# Altium PCB AIRZAI_LID_BD_REVA.PcbDoc (part 2 of 2)
Units mil, origin at the board's own origin, x right, y up, seen from the top; angles counter-clockwise.
Board outline 3392.82 x 2969.83 mil, 4 copper layers (Top, GND, PWR, Bottom), stack 30.709 mil thick; 77 components, 60 nets, 278 pads, 262 vias.
Unrouted connection lines stored in the file: 140.
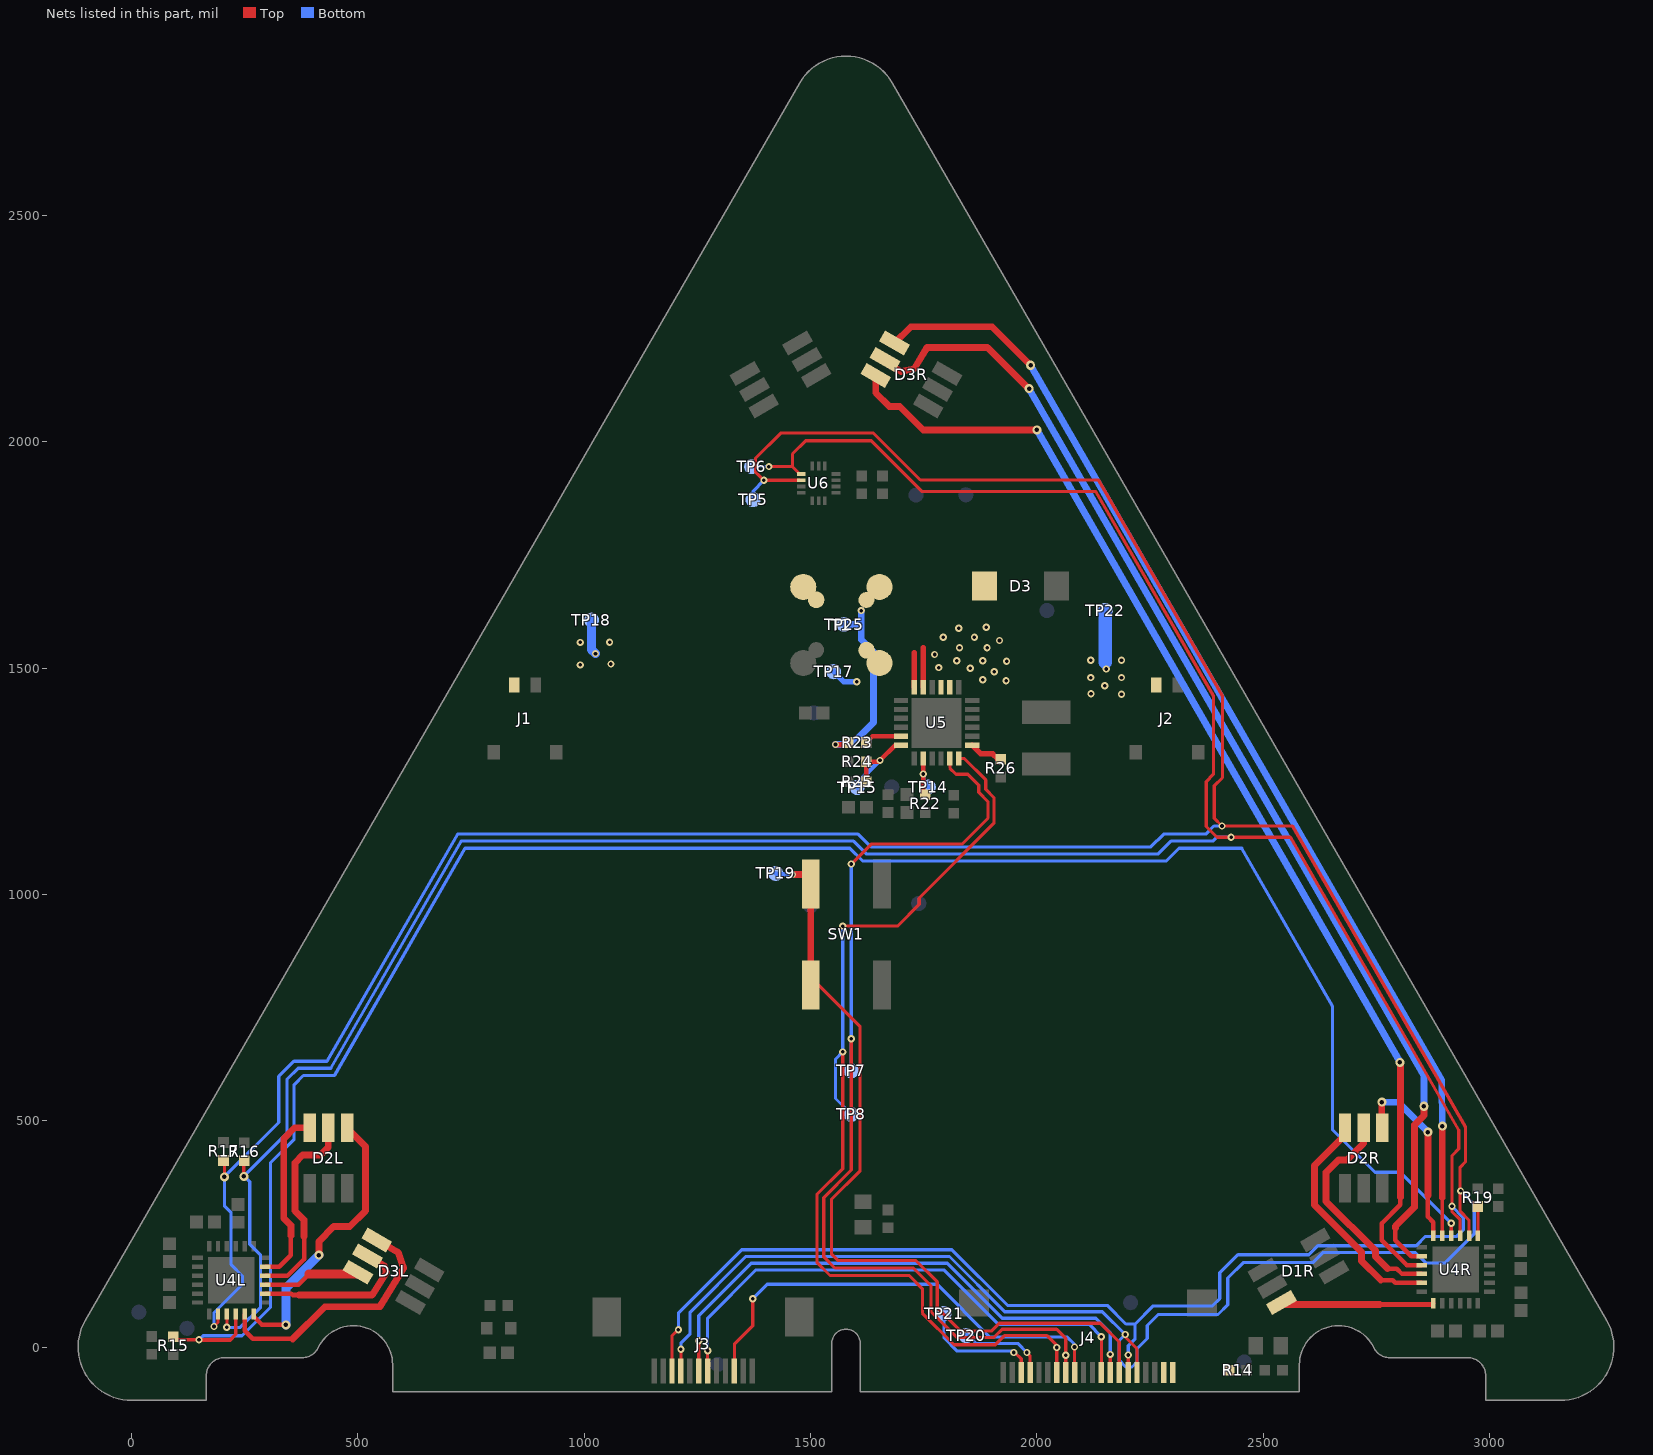
[diagram p4: the nets of this part, all layers, seen from the top]

## Via types
v1: diameter 16, hole 8, Top to Bottom, tented both sides, 175 vias
v2: diameter 20, hole 10, Top to Bottom, tented both sides, 71 vias
v3: diameter 20, hole 8, Top to Bottom, 10 vias
v4: diameter 20, hole 10, Top to Bottom, 5 vias
v5: diameter 23.62, hole 11.81, Top to Bottom, tented both sides, 1 vias

## Nets (pads, with @x,y where several pads share a name; then routed paths per layer and width w, separated by ;. In a path a pad name is that pad's centre, name@x,y a point inside that pad or via, vN(x,y) a via of type N, cw(c..) or ccw(c..) an arc to the next point about the centre after c; other vN are vias at no path point) (continued)
NetD1R_6: D1R.6 U4R.19 | length 338.4
  Top w10: 2757.54,94 2873.53,94 U4R.19@2875.98,96.46
  Top w15: D1R.6@2540.38,98.29 2544.68,94 2757.54,94
NetD2L_4: D2L.4 U4L.12 | length 630.5
  Top w10: U4L.12@269.68,72.83 269.68,67.32 288,49 v2(341,49)
  Top w15: v2(414,203) 414,233.43 446.57,266 482,266 517,301 517,443.35 D2L.4@475.94,484.41
  Bottom w20: v2(341,49) 341,130 v2(414,203)
NetD2L_5: D2L.5 U4L.16 | length 452.8
  Top w10: U4L.16@295.28,157.48 344.42,157.48 381,194.06 381,244
  Top w15: 381,244 381,281 361,301 361,407 378,424 417,424 434.61,441.61 D2L.5@434.61,484.41
NetD2L_6: D2L.6 U4L.17 | length 398.4
  Top w10: U4L.17@295.28,177.17 326.17,177.17 352,203 352,246
  Top w15: 352,246 352,269 336,285 336,460 360.41,484.41 D2L.6@393.27,484.41
NetD2R_4: D2R.4 U4R.12 | length 421.4
  Top w10: 2864,335 2864,288 2875.98,276.02 U4R.12@2875.98,246.06
  Top w15: v2(2762,541) 2762,485.76 D2R.4@2763.35,484.41 ; 2864,335 v2(2864,475) v2@2864,476
  Bottom w15: v2(2762,541) 2798,541 v2(2864,475)
NetD2R_5: D2R.5 U4R.16 | length 493.4
  Top w10: 2774.69,173.31 2794.69,173.31 2806.58,161.42 U4R.16@2850.39,161.42
  Top w15: D2R.5@2722.01,484.41 2722.01,450.01 2685,413 2666,413 2639,386 2639,322 2748,213 2748,200 2774.69,173.31
NetD2R_6: D2R.6 U4R.17 | length 518.7
  Top w10: 2759.68,147.67 2785.87,147.67 2791.81,141.73 U4R.17@2850.39,141.73
  Top w15: D2R.6@2680.67,484.41 2680.67,468.67 2613,401 2613,314 2717,210 2717,190.36 2759.68,147.67
NetD3_1: D3.1 R23.2 T1.3 TP25.1 | length 458.4
  Top w12: v1(1555,1331) 1578.95,1331 R23.2@1583.42,1335.46
  Bottom w15: v1(1555,1331) 1590.54,1331 1639,1379.46 1639,1536 1612,1563 v1(1612,1627) 1612,1602.24 1605.76,1596 TP25.1@1574,1596
NetD3L_4: D3L.4 U4L.11 | length 564
  Top w10: U4L.11@250,72.83 250,36 268,18 356,18
  Top w15: 356,18 427,89 549,89 ; D3L.4@541.6,236.82 589,209 598,182.62 600,177 601,174 549,89.38
NetD3L_5: D3L.5 U4L.14 | length 354
  Top w10: U4L.14@295.28,118.11 353,118.11 356.11,115 370.11,115
  Top w15: 370.11,115 531,115 ; D3L.5@520.94,201.02 559,179 563,165.35 531.91,115.43
NetD3L_6: D3L.6 U4L.15 | length 216.4
  Top w10: U4L.15@295.28,137.8 368.8,137.8 392.42,161.42
  Top w20: 392.42,161.42 496.46,161.42 D3L.6@500.27,165.22
NetD3R_4: D3R.4 U4R.11 | length 2516.4
  Top w8: U4R.11@2895.67,246.06 2895.67,330
  Top w15: D3R.4@1685.31,2217.77 1721.54,2254 1901,2254 v2(1986,2169) ; 2895.67,330 v2(2895.67,488)
  Bottom w15: v2(1986,2169) 2894.63,588.4 v2(2895.67,488)
NetD3R_5: D3R.5 U4R.14 | length 2611.9
  Top w10: 2792,263 2792,236 2827.21,200.79 U4R.14@2850.39,200.79
  Top w15: D3R.5@1664.64,2181.97 1673.45,2181.97 1673.45,2170 1700,2155 1729,2161 1757.05,2208.17 1890.45,2208.17 v2@1982.15,2116.47 ; 2792,263 2792,267 2834,309 2834,491 2855,512 v2(2855,532)
  Bottom w15: v2(1982.83,2117.16) 2855,600 v2(2855,532)
NetD3R_6: D3R.6 U4R.15 | length 2560.7
  Top w10: 2803,331 2803,314 2762,273 2762,236 2816.9,181.1 U4R.15@2850.39,181.1
  Top w15: D3R.6@1643.97,2146.17 1643.97,2108.03 1674,2078 1697,2078 1749,2026 v2(2000,2026) ; 2803,331 v2@2803,630
  Bottom w15: v2(2000,2026) v2@2802.63,629.79
  other v2: 2802,629
NetJ1_1: J1.1 TP18.1 U5.21 | length 77.7
  Bottom w20: TP18.1@1016,1606 1016,1541 v1(1025,1532)
  other v1: 1783,1501 991,1507 1059,1509 1774,1530 1829,1545 1890,1545 991,1556.62 1056,1557 1917.35,1561 1793,1568 1862,1568 1827.55,1588 1888,1590
NetJ2_1: J2.1 TP22.1 U5.20 | length 114
  Bottom w30: 2151,1513 TP22.1@2151,1627
  other v1: 2187,1442 2119.5,1443 2150.09,1461 1932,1472 1880.23,1474 2119,1479 2187,1479 1906,1492 2153,1498 1853,1499.62 1933,1515 1822.98,1516 1880.23,1516 2119,1517 2187,1517
NetJ4_1: J4.1 J4.2 R14.2
NetR15_1: R15.1 U4L.10 U4R.10 | length 4358.8
  Top w7: 230.31,28.02 U4L.10@230.31,72.83 ; U4R.10@2915.35,246.06 v1(2915.35,273.62)
  Top w8: R15.1@91.76,22.83 99.13,15.46 99.66,16 v1(149,16) 149.54,15.46 217.76,15.46 230.31,28.02
  Bottom w7: v1(149,16) 158,25 244,25 307,88 307,407 359,459 359,579.36 379.64,600 448,600 736.44,1101.75 1587,1101.75 1614.75,1074 2286.25,1074 2314,1101.75 2452.43,1101.75 2452.64,1101.54 2653,753 2653,480 2747,386 2802.98,386 v1(2915.35,273.62)
NetR19_1: R19.1 U4R.7 | length 66.5
  Top w7: R19.1@2969,310.32 2974.41,304.91 U4R.7@2974.41,246.06
NetR22_2: R22.2 TP14.1 U5.8 | length 122.3
  Top w10: R22.2@1746.81,1226.8 R22.2@1748.81,1224.8 ; R22.2@1748.81,1221 R22.2@1748.81,1224.8 ; U5.8@1748.81,1300.28 v1(1748.81,1266) R22.2@1748.81,1224.8 ; R22.2@1753.46,1220.15 R22.2@1748.81,1224.8
  Bottom w10: v1(1748.81,1266) 1748.81,1248.19 TP14.1@1760,1237
NetR23_1: R23.1 U5.5 | length 82.6
  Top w10: R23.1@1622.79,1335.46 1636.81,1349.49 U5.5@1699.6,1349.49
NetR24_1: R24.1 R25.2 TP15.1 U5.6 | length 216.7
  Top w10: R25.2@1622.79,1249.12 R24.1@1622.79,1292.89 1650.18,1292.89 v1(1653.29,1296) 1687.09,1329.8 U5.6@1699.6,1329.8
  Bottom w10: TP15.1@1603,1236 1603,1245.71 v1(1653.29,1296)
NetR26_1: R26.1 U5.13 | length 69.9
  Top w12: U5.13@1857.08,1329.8 1876.44,1310.44 1902.09,1310.44 R26.1@1914,1298.53
NetT1_2: T1.2 T1.4 TP17.1 U5.23 U5.24 | length 224.1
  Top w12: U5.24@1729.13,1457.76 1729.13,1534.09 ; U5.23@1748.81,1457.76 1748.81,1545.41
  Bottom w12: TP17.1@1551,1492 1573,1470 v1(1602,1470)
PWM1: J4.13 TP7.1 U5.11 | length 2223.2
  Top w7: v1(1590,681) 1590,391 1529,330 1529,199.34 1553.79,174.55 1727,174.55 1766,135.55 1766,78.17 1822.9,21.27 1905.27,21.27 1923.17,39.17 2043.59,39.17 2063.7,19.06 v1(2063.7,-18) J4.13@2063.7,-56.34 ; v1(1590,1067) 1634,1111 1834.53,1111 1892,1168.47 1892,1205 1871.5,1225.5 1871.5,1241.5 1847.65,1265.35 1821.35,1265.35 1807.87,1278.84 U5.11@1807.87,1300.28
  Bottom w7: TP7.1@1590,610 v1(1590,681) v1(1590,1067)
PWM2: J4.14 TP8.1 U5.12 | length 2260.1
  Top w7: v1(1571,652) 1571,394 1514,337 1514,187 1543,158 1718,158 1747,129 1747,74.86 1816.96,4.9 1907.9,4.9 1928.2,25.2 2022.68,25.2 2044.02,3.86 v1(2044.02,-1) J4.14@2044.02,-56.34 ; v1(1571,930) 1692,930 1740,978 1740,992 1905,1157 1905,1214 1887,1232 1887,1253 1839.72,1300.28 U5.12@1827.55,1300.28
  Bottom w7: v1@1571,931 v1(1571,930) v1(1571,652) 1555,636 1555,549 TP8.1@1590,514
SCL: J3.10 J4.6 R16.1 TP6.1 U4L.9 U4R.9 U6.1 | length 8295.7
  Top w7: v1(210,43.49) 210.38,43.49 210.63,43.24 U4L.9@210.63,72.83 ; J3.10@1193.9,-52.93 1193.9,24.9 v1@1207.5,38.5 ; v1(1408,1945) 1460.09,1945 ; U6.1@1476.42,1928.68 1460.09,1945 ; J4.6@2201.5,-56.34 2202,-55.83 v1(2202,-17.7) ; U4R.9@2935.04,246.06 2935.04,280.96 2917,299 2917,423 2932,438 2932,479 2560.08,1126.19 v1(2429,1126.19) 2397.81,1126.19 2374,1150 2374,1249.16 2390,1265.16 2390,1438.23 2130.17,1890.37 1745.63,1890.37 1634,2002 1489,2002 1460.09,1973.09 1460.09,1945
  Top w8: v2(248,377) 248,410.79 R16.1@248.99,411.78
  Bottom w7: v1(210,43.49) 240.49,43.49 285,88 285,203 261,227 261,365 249,377 v2(248,377) 343,472 343,591 368,616 440,616 728.44,1117.75 1595,1117.75 1623.75,1089 2267.25,1089 2296,1117.75 2388.75,1117.75 2397.19,1126.19 v1(2429,1126.19) ; v1(1208,38) 1208,75 1348,215 1812,215 1935,92 2155.54,92 2196.54,51 2217,51 ; TP6.1@1370,1945 v1(1408,1945) ; v1(2202,-17.7) 2202,3 2217,18 2217,51 ; v1(2917,311) 2942,286 2942,259 2927.4,244.4 2858.4,244.4 2837.71,223.71 2620.71,223.71 2601,204 2444,204 2404,164 2404,107 2388,91 2257,91 2217,51
SDA: J3.9 J4.5 R17.1 TP5.1 U4L.8 U4R.8 U6.2 | length 8658.1
  Top w7: v1(182,45.28) 190.94,54.22 U4L.8@190.94,72.83 ; R17.1@203.24,412.32 205,410.55 v2(205,376) ; J3.9@1213.58,-52.93 v1(1213.58,-5) ; U6.2@1476.42,1914.9 v1(1397,1914.9) 1378,1933.9 1378,1963 1434,2019 1639,2019 1742.64,1915.36 2135.81,1915.36 2410,1438.23 2410,1258 2392,1240 2392,1168 v1(2409,1151) 2409.13,1150.87 2564.78,1150.87 2947,485.76 2947,409 2935.04,397.04 2935.04,299.96 2954.72,280.28 U4R.8@2954.72,246.06 ; v1(2195,27.64) 2195,22.19 2221.18,-3.99 J4.5@2221.18,-56.34
  Bottom w7: v1(182,45.28) 182,76 245,139 245,157 220,182 220,297 205,312 v2(205,376) 325,496 325,598 358.5,631.5 432,631.5 720.44,1133.25 1605,1133.25 1633.25,1105 2251.75,1105 2280,1133.25 2373.25,1133.25 2391,1151 v1(2409,1151) ; v1(1213.58,-5) 1213.58,8.58 1234,29 1234,77 1357,200 1807,200 1929,78 2144.64,78 v1(2195,27.64) 2181.81,14.45 2181.81,-29.31 2196.5,-44 2210,-44 2221.18,-32.82 2221.18,-3.59 2243.71,18.94 2243.71,47.71 2268,72 2400,72 2421.5,93.5 2421.5,152.5 2455.5,186.5 2609.5,186.5 2631.55,208.55 2836.45,208.55 2859,186 2902,186 2966.14,250.14 2966.14,314.86 v1(2936,345) ; TP5.1@1373,1872 1373,1890.9 v1(1397,1914.9)
SPR_GPO1: J4.7 SW1.1 TP19.1 | length 1824.1
  Top w7: SW1.1@1500.24,800.2 1516.8,800.2 1609.52,707.48 1609.52,389.52 1546,326 1546,206 1561,191 1733,191 1780,144 1780,87 1831.9,35.1 1899.22,35.1 1916.82,52.7 2140.3,52.7 2181.81,11.19 J4.7@2181.81,-56.34
  Top w15: v1(1460,1044) 1491,1044 1500.24,1034.76 SW1.1@1500.24,1022.64 SW1.1@1500.24,800.2
  Bottom w10: TP19.1@1423,1046.46 1425.46,1044 v1(1460,1044)
SPR_GPO2: J4.17 TP20.1 | length 200
  Top w7: v1(1978,-12) 1976.61,-12 1984.96,-20.35 J4.17@1984.96,-56.34
  Bottom w7: TP20.1@1844.24,29.24 1865.48,8 1958,8 v1(1978,-12)
SPR_GPO3: J4.18 TP21.1 | length 273.7
  Top w7: v1(1949,-12) 1951.3,-12 1965.28,-25.97 J4.18@1965.28,-56.34
  Bottom w7: TP21.1@1795,74 1795,20 1824,-9 1946,-9 v1(1949,-12)
SWIPE/RDY: J3.6 J4.9 | length 1171
  Top w7: J3.6@1272.64,-52.93 v1(1272.64,-8.36) ; J4.9@2142.44,-56.34 v1(2142.44,23)
  Bottom w7: v1(1272.64,-8.36) 1272.64,63.64 1379.45,170.45 1794.51,170.45 1914.95,50 2115.44,50 v1(2142.44,23)
TOFINT: J3.7 J4.8 | length 1230.9
  Top w7: J3.7@1252.95,-52.93 v1(1252.95,14) ; v1(2162,-16.22) 2162,-56.21 J4.8@2162.13,-56.34
  Bottom w7: v1(1252.95,14) 1252.95,68.95 1369,185 1802.03,185 1923.39,63.64 2130.36,63.64 2162.13,31.87 2162,31.75 v1(2162,-16.22)
XSHUNT: J3.3 J4.12 | length 1017.7
  Top w7: J3.3@1331.69,-52.93 1331.69,6.34 1372.44,47.09 v1(1372.44,106.69) ; v1(2083,0) 2083,-55.95 J4.12@2083.39,-56.34
  Bottom w7: v1(1372.44,106.69) 1404.29,138.54 1779.46,138.54 1896,22 2067,22 2083,6 v1(2083,0)
pads on no net: J1.0 J2.0 J3.8 J3.MP1 J3.MP2 J4.MP1 J4.MP2 U5.19 U5.22 U6.5 U6.6
copper on no net:
  other v5: 0,0

## Polygon pours and split planes (outlines as drawn)
GND on Top "TOP_GND" (solid, remove dead copper, pour order 14): -0.51,-117.24 164.84,-117.24 164.84,-62.12 cw(c204.21,-62.12) 204.21,-22.75 376.36,-22.75 ccw(c376.36,16.62) 411.76,-0.61 cw(c489.65,-38.5) 576.26,-38.5 576.26,-97.56 1546.33,-97.56 1546.33,8.74 cw(c1577.83,8.74) 1609.32,8.74 1609.32,-97.56 2579.39,-97.56 2579.39,-38.5 cw(c2666.01,-38.5) 2743.89,-0.61 ccw(c2779.29,16.62) 2779.29,-22.75 2951.44,-22.75 cw(c2951.44,-62.12) 2990.81,-62.12 2990.81,-117.24 3156.16,-117.24 ccw(c3156.16,0.87) 3258.45,59.92 1680.11,2793.68 ccw(c1577.83,2734.63) 1475.54,2793.68 -102.8,59.92 ccw(c-0.51,0.87)
3V3 on Top "Top-3V3 1" (solid, remove dead copper, pour order 10): 2056,69 2183.9,69 2257,-4.1 2257,-53.34 2266,-53.34 2266,50 2187.03,128.97 2056,128.97
NetC32_2 on Top "Top-NetC32_2" (solid, pour order 8): 1965.03,1731 1965,1558 1965,1457.93 1921.43,1414.36 1841,1414.36 1841,1383.46 1905.53,1383.46 1925,1364 2077.98,1364 2093,1379.02 2093,1731
3V3 on Top "Top-3V3" (solid, remove dead copper, pour order 12): 2063,69 2063,101 2063,129.04 cw(c2048.35,460.12) 1824.59,215.65 1764.49,279.7 ccw(c1756.64,268.62) 1754.33,282 1562,282 1562,222 1732,222 1885,69
+5 on Top "Top-+5" (solid, pour order 0): 1494,1531.86 1494,1435 1518.13,1435 1518.13,1382.55 1715.93,1382.55 1715.93,1395 1661.81,1395 1640,1416.81 1640,1448 1577,1448 1577,1531.86
GND on Bottom "BOT_GND" (solid, remove dead copper, pour order 16): -0.51,-117.24 164.84,-117.24 164.84,-62.12 cw(c204.21,-62.12) 204.21,-22.75 376.36,-22.75 ccw(c376.36,16.62) 411.76,-0.61 cw(c489.65,-38.5) 576.26,-38.5 576.26,-97.56 1546.33,-97.56 1546.33,8.74 cw(c1577.83,8.74) 1609.32,8.74 1609.32,-97.56 2579.39,-97.56 2579.39,-38.5 cw(c2666.01,-38.5) 2743.89,-0.61 ccw(c2779.29,16.62) 2779.29,-22.75 2951.44,-22.75 cw(c2951.44,-62.12) 2990.81,-62.12 2990.81,-117.24 3156.16,-117.24 ccw(c3156.16,0.87) 3258.45,59.92 1680.11,2793.68 ccw(c1577.83,2734.63) 1475.54,2793.68 -102.8,59.92 ccw(c-0.51,0.87)
GND on GND (split plane): 291 vertices, not listed, extent -98.06,-97.94 3254.64,2300.45
+5 on PWR (split plane): 291 vertices, not listed, extent -98.06,-97.94 3254.64,2300.45
3V3 on PWR (split plane): 199 vertices, not listed, extent 988.1,-9.24 2103.9,1919.9

## Keep-outs
Keep-Out Layer:
  circle w82.68: c2667.32,-40.35 r43.31
  circle w82.68: c488.19,-37.4 r43.31
  circle w78.74: c2122.6,587.76 r39.37
  circle w78.74: c1036.97,600.55 r39.37
  circle w393.7: c2123.58,596.38 r236.22
  circle w393.7: c1033.03,596.38 r236.22
  circle w78.74: c1578.31,2522.8 r39.37
  circle w31.5: c1578.31,2522.8 r83.66
  circle w31.5: c1033.03,596.38 r447.83
  circle w31.5: c2123.58,596.38 r447.83
  lines w19.68: 576.73,-98.35 1546.8,-98.35 ; 1609.79,-98.35 2579.86,-98.35
  lines w31.5: 576.73,-98.35 576.73,-39.3 ccw(c490.11,-39.3) 412.23,-1.41 cw(c376.83,15.82) 376.83,-23.55 204.68,-23.55 ccw(c204.68,-62.92) 165.31,-62.92 165.31,-118.04 -0.04,-118.04 cw(c-0.04,0.07) -102.33,59.13 1476.01,2792.88 cw(c1578.29,2733.83) 1680.58,2792.88 3258.91,59.13 cw(c3156.63,0.07) 3156.63,-118.04 2991.27,-118.04 2991.27,-62.92 ccw(c2951.9,-62.92) 2951.9,-23.55 2779.76,-23.55 cw(c2779.76,15.82) 2744.36,-1.41 ccw(c2666.47,-39.3) 2579.86,-39.3 2579.86,-98.35 ; 1546.8,-98.35 1546.8,7.94 cw(c1578.29,7.94) 1609.79,7.94 1609.79,-98.35
  lines w35.43: 1577.76,-97.37 1577.76,8.93
  lines w94.49: 202.69,-78.74 544.29,-78.74 ; 2612.13,-68.9 2953.74,-68.9

## Other copper
Top:
  rectangle net 3V3: 2206,46 2266,116
  rectangle net NetD3_1: 1592,1652 1659,1735
  rectangle net +5: 1428,1466 1527.69,1574
  rectangle net NetT1_2: 1428,1611 1551.63,1734
  region net NetT1_2: 1597,1535 1630.83,1568.83 1538.66,1661 1504.83,1627.17
  rectangle net +5: 2410,22.83 2462,84.65
  rectangle net +5: 2278,5 2460.36,55
  rectangle net +5: 2454,-32 2511,58.58
  rectangle net +5: 2454,-79 2521,-27
  rectangle net NetJ4_1: 2278,-80 2439,-1.87
  rectangle net +5: 4,102 57.96,141.73
  rectangle net +5: 1531,1352 1561,1379.02
  rectangle net +5: 1502,1335.46 1536,1370
  region net +5: 3147.5,111.5 3176,140 3135,181 3106.5,152.5
  region net NetJ1_1: 1075,1493.64 1075,1569 912,1569 912,1493.64
  region net NetJ1_1: 1054,1493.64 1054,1550 812,1550 812,1493.64
  region net NetJ1_1: 861.64,1436 861.64,1550 813,1550 813,1436
  region net NetJ2_1: 2276,1430 2276,1529 2105.19,1529 2105.19,1430
  region net NetC31_2: 1682,1164 1682,1191 1610,1191 1610,1164
  region net NetJ1_1: 1932,1533 1932,1603 1761.15,1603 1761.15,1533
  region net +5: 1630.75,1366 1630.75,1437 1512,1437 1512,1366
  region net NetJ2_1: 1944,1460 1944,1526 1851,1526 1851,1460
  region net NetJ2_1: 1938.25,1485 1938.25,1526 1802,1526 1802,1485
  region net NetJ2_1: 1814,1454 1814,1492 1802,1492 1802,1454
  region net NetJ1_1: 1796,1485 1796,1561 1761,1561 1761,1485
  region net NetJ1_1: 1794,1454 1794,1497 1783,1497 1783,1454
  region net 3V3: 1180,-11 1180,14 1038,14 1038,-11
  region net 3V3: 1180,7 1180,107 1138,107 1138,7
  region net 3V3: 1180,-42 1180,20 1168,20 1168,-42
  region net +5: 1157,-71 1157,-19 970,-19 970,-71
  region net +5: 3141,147 3141,204 3095,204 3095,147
  region net +5: 3114,154.04 3114,188.58 3037,188.58 3037,154.04
  region net +5: 3083,155 3083,166 2988,166 2988,155
  region net +5: 125,136 125,163 92,163 92,136
  region net +5: 100,125 100,163 4,163 4,125
  rectangle net NetD3_1: 1601,1615 1950.59,1734
  rectangle net NetT1_2: 1591,1461 1707.92,1577
  rectangle net NetT1_2: 1591,1485 1754.76,1577
  pour cut-out: 1190.11,2297.7 1966.47,2297.7 1674.43,2803 1657.66,2819.77 ccw(c1580,2742.11) 1580,2851.94 ccw(c1580,2733.09) 1495.96,2817.13 1483.83,2805
  pour cut-out: 1693.69,1463.66 1693.69,1295 1863.37,1295 1862.98,1295.39 1862.98,1463.66
  pour cut-out: 1462.64,1852.89 1572.87,1852.89 1572.87,1963.13 1462.64,1963.13
  pour cut-out: 1131.59,147 1131.59,22.83 1083.59,22.83 1083.59,111.94 1080.59,111.94 1080.59,147
  pour cut-out: 1394,147 1394,22.83 1442,22.83 1442,111.94 1445,111.94 1445,147
  pour cut-out: 2838.58,257.87 2838.58,84.65 3011.81,84.65 3011.81,257.87
  pour cut-out: 133.86,234.25 307.09,234.25 307.09,61.02 133.86,61.02
Bottom:
  rectangle net NetJ2_1: 2032,1420 2198,1566
  rectangle net NetJ2_1: 1965,1461 2198,1568
  rectangle net NetJ1_1: 1113,1492 1270,1762
  rectangle net NetJ1_1: 1071,1492 1199,1570
  rectangle net NetJ1_1: 1148,1644 1684,1762
  rectangle net NetJ2_1: 1964.82,1506 2024,1544
  rectangle net 3V3: 1041,-5 1138,26
  rectangle net NetJ1_1: 955,1493 1075,1570
  region net NetJ1_1: 1932,1576 1932,1762 1675,1762 1675,1576
  region net NetJ1_1: 1794,1462 1794,1586 1675,1586 1675,1462
  region net NetJ1_1: 1932,1535 1932,1587 1734,1587 1734,1535
  region net NetJ2_1: 2129,1462 2129,1528 1803,1528 1803,1462
  pour cut-out: 1190.11,2297.7 1966.47,2297.7 1674.43,2803 1657.66,2819.77 ccw(c1580,2742.11) 1580,2851.94 ccw(c1580,2733.09) 1495.96,2817.13 1483.83,2805
GND (plane layer: these items are gaps in the copper):
  pour cut-out: 1189,2299 1964.86,2300.5 1681,2792.15 1651.77,2821.38 ccw(c1578,2747.62) 1578,2851.94 ccw(c1578,2733.5) 1494.25,2817.25 1483,2806 1189,2301
  region: 1190.86,2299
PWR (plane layer: these items are gaps in the copper):
  pour cut-out: 1189,2299 1964.86,2300.5 1681,2792.15 1651.77,2821.38 ccw(c1578,2747.62) 1578,2851.94 ccw(c1578,2733.5) 1494.25,2817.25 1483,2806 1189,2301
  lines w10: 983,156 983,35 1032.34,-14.34 1278.96,-14.34 1471.29,178 1757,178 1919.41,15.59 2109,15.59 2109,149.91 ; 1441.13,781.13 1422.8,799.47 1422.8,800.17 1644,1021.37 1644,1632.65 1443.87,1832.78 1443.87,1925 1720.44,1925 1816,1829.44 1816,927.1 1870.95,982.05

## Silkscreen, mask and mechanical layers (free items; w line width, h text height)
Top Overlay:
  lines w8: 2563,-33 2572,-24 2572,29.87 2619.13,77 2627,77
Bottom Overlay:
  rectangle: 719.96,1087 1155,1288
  text "Airzai LID BRD R2" at 1380,1325 h90
  text "1905" at 1342,1178.42 h80
Mechanical 1:
  lines w3.94: 0,-118.11 cw(c0,0) -102.28,59.06 68.19,354.33
Mechanical 2:
  lines w1.97: -311.85,-118.04 -0.04,-118.04 ; -118.15,0.09 -118.08,-201.32 ; 570.2,777.61 cw(c1033.03,596.38) 842.34,137.37 ; 1015.53,1093.1 ccw(c1033.02,596.36) 1033.02,99.32 ; 2123.57,99.32 ccw(c2123.57,596.36) 2141.05,1093.1 ; 2314.28,1055.39 ccw(c2123.58,596.38) 2586.41,415.15
  lines w10: 1015.53,1093.1 1350.08,1672.57 cw(c1578.29,1540.81) 1806.5,1672.57 2141.05,1093.1 ; 1030.51,99.41 2121.06,99.41
Mechanical 3:
  lines w0.05: 367.66,417.49 501.52,417.49 ; 434.59,348.6 434.59,417.49 ; 612.36,225.51 578.9,167.55 638.57,133.1 ; 775.73,1383.76 869.63,1383.76 869.63,1466.44 ; 1374.32,2114.04 1433.98,2148.49 1467.45,2090.53 ; 1456.24,911.32 1578.29,911.32 1578.29,777.47 ; 1662.93,2182.94 1722.6,2148.49 1689.14,2090.53 ; 2286.95,1301.09 2286.95,1383.76 2380.85,1383.76 ; 2544.22,225.51 2577.68,167.55 2637.35,201.99 ; 2655.06,417.49 2721.99,417.49 2721.99,486.39 ; 367.66,348.6 367.66,486.39 501.52,486.39 501.52,348.6 367.66,348.6 ; 485.77,144.03 605.1,75.13 672.03,191.06 552.7,259.96 485.77,144.03 ; 775.73,1301.09 775.73,1466.44 963.53,1466.44 963.53,1301.09 775.73,1301.09 ; 1340.85,2172.01 1460.19,2240.9 1527.12,2124.98 1407.78,2056.08 1340.85,2172.01 ; 1456.24,777.47 1700.34,777.47 1700.34,1045.18 1456.24,1045.18 1456.24,777.47 ; 1629.47,2124.98 1696.4,2240.9 1815.73,2172.01 1748.8,2056.08 1629.47,2124.98 ; 2193.06,1301.09 2380.85,1301.09 2380.85,1466.44 2193.06,1466.44 2193.06,1301.09 ; 2484.55,191.06 2551.48,75.13 2670.82,144.03 2603.89,259.96 2484.55,191.06 ; 2655.06,348.6 2788.92,348.6 2788.92,486.39 2655.06,486.39 2655.06,348.6
Mechanical 4:
  circle w1.97: c1578.29,2522.81 r83.66
  circle w1.97: c1033.02,596.36 r447.83
  circle w1.97: c2123.57,596.36 r447.83
  lines w1.97: -102.33,59.13 ccw(c-0.04,0.07) -0.04,-118.04 165.31,-118.04 165.31,-62.92 cw(c204.68,-62.92) 204.68,-23.55 376.83,-23.55 ccw(c376.83,15.82) 412.23,-1.41 cw(c490.11,-39.3) 576.73,-39.3 576.73,-98.35 1546.8,-98.35 1546.8,7.94 cw(c1578.29,7.94) 1609.79,7.94 1609.79,-98.35 2579.86,-98.35 2579.86,-39.3 cw(c2666.47,-39.3) 2744.36,-1.41 ccw(c2779.76,15.82) 2779.76,-23.55 2951.9,-23.55 cw(c2951.9,-62.92) 2991.27,-62.92 2991.27,-118.04 3156.63,-118.04 ccw(c3156.63,0.07) 3258.91,59.13 1680.58,2792.88 ccw(c1578.29,2733.83) 1476.01,2792.88 -102.33,59.13
Drill Drawing:
  circle w10: c-1776.34,-2323.22 r33.33
  lines w10: -1809.68,-2189.89 -1793.01,-2189.89 -1776.34,-2206.56 -1759.68,-2189.89 -1743.01,-2189.89 -1759.68,-2173.22 -1743.01,-2156.56 -1759.68,-2156.56 -1776.34,-2139.89 -1793.01,-2156.56 -1809.68,-2156.56 -1793.01,-2173.22 -1809.68,-2189.89 ; -1809.68,-2056.56 -1743.01,-2056.56 -1743.01,-1989.89 -1809.68,-1989.89 -1809.68,-2056.56 ; -370.83,-0.98 -134.61,-0.98 -134.61,156.5 -370.83,156.5 -370.83,-0.98 ; 0.24,-292.32 0.24,-134.84 236.46,-134.84 236.46,-292.32 0.24,-292.32 ; 5868.35,1367.13 6104.57,1367.13 6104.57,1524.61 5868.35,1524.61 5868.35,1367.13 ; 5868.35,2439.96 5868.35,2597.44 6104.57,2597.44 6104.57,2439.96 5868.35,2439.96 ; 5878.19,1652.56 5878.19,1810.04 6114.41,1810.04 6114.41,1652.56 5878.19,1652.56
  lines w15: -1869.47,-1951.56 8451.68,-1951.56 ; -1318.59,-2251.56 -1318.59,-2551.56 -1318.59,-1801.56 ; -884.69,-2551.56 -884.69,-2251.56 ; -718.75,-2551.56 -718.75,-1801.56 ; -162.89,-2551.56 -162.89,-2251.56 ; 342.99,-2551.56 342.99,-2251.56 ; 370.93,-2551.56 370.93,-1801.56 ; 876.81,-2551.56 876.81,-1801.56 ; 1076.79,-2551.56 1076.79,-2251.56 ; 1610.61,-2551.56 1610.61,-1801.56 ; 2266.44,-2551.56 2266.44,-2251.56 ; 2800.26,-2551.56 2800.26,-1801.56 ; 2856.29,-2551.56 2856.29,-2251.56 ; 3390.11,-2551.56 3390.11,-1801.56 ; 3602.09,-2551.56 3602.09,-2251.56 ; 4135.91,-2551.56 4135.91,-1801.56 ; 4251.92,-2551.56 4251.92,-2251.56 ; 4885.7,-2551.56 4885.7,-1801.56 ; 5105.68,-2551.56 5105.68,-2251.56 ; 5739.47,-2551.56 5739.47,-1801.56 ; 6439.29,-2551.56 6439.29,-2251.56 ; 7073.07,-2551.56 7073.07,-1801.56 ; 8451.68,-2401.56 -1869.47,-2401.56 ; -1869.47,-2551.56 7817.9,-2551.56 7817.9,-2251.56 -1869.47,-2251.56 -1869.47,-2551.56 ; -1869.47,-2551.56 8451.68,-2551.56 8451.68,-1801.56 -1869.47,-1801.56 -1869.47,-2551.56 ; -1869.47,-2401.56 7817.9,-2401.56 -1869.47,-2401.56
  text "5" at -282.24,38.39 h78.74
  text "5" at 88.82,-252.95 h78.74
  text "Symbol" at -1779.47,-1906.56 h72
  text "Count" at -1273.59,-1906.56 h72
  text "Hole Size" at -673.75,-1906.56 h72
  text "Plated" at 415.93,-1906.56 h72
  text "Hole Type" at 921.81,-1906.56 h72
  text "Drill Layer Pair" at 1655.61,-1906.56 h72
  text "Via/Pad" at 2845.26,-1906.56 h72
  text "Pad Shape" at 3435.11,-1906.56 h72
  text "Template" at 4180.91,-1906.56 h72
  text "Description" at 4930.7,-1906.56 h72
  text "Hole Tolerance (+)" at 5784.47,-1906.56 h72
  text "Hole Tolerance (-)" at 7118.07,-1906.56 h72
  text "1" at -1273.59,-2056.56 h60
  text "0.300mm (11.81mil)" at -673.75,-2056.56 h60
  text "PTH" at 415.93,-2056.56 h60
  text "Round" at 921.81,-2056.56 h60
  text "Top - Bottom" at 1655.61,-2056.56 h60
  text "Via" at 2845.26,-2056.56 h60
  text "Rounded" at 3435.11,-2056.56 h60
  text "v60h30m0mx0" at 4180.91,-2056.56 h60
  text "76" at -1273.59,-2206.56 h60
  text "0.254mm (10.00mil)" at -673.75,-2206.56 h60
  text "PTH" at 415.93,-2206.56 h60
  text "Round" at 921.81,-2206.56 h60
  text "Top - Bottom" at 1655.61,-2206.56 h60
  text "Via" at 2845.26,-2206.56 h60
  text "Rounded" at 3435.11,-2206.56 h60
  text "(Mixed)" at 4180.91,-2206.56 h60
  text "Symbol" at -1779.47,-2356.56 h72
  text "Count" at -1273.59,-2356.56 h72
  text "185" at -1273.59,-2356.56 h60
  text "Hole Size" at -839.69,-2356.56 h72
  text "0.203mm (8.00mil)" at -673.75,-2356.56 h60
  text "Plated" at -117.89,-2356.56 h72
  text "Hole Type" at 387.99,-2356.56 h72
  text "PTH" at 415.93,-2356.56 h60
  text "Round" at 921.81,-2356.56 h60
  text "Drill Layer Pair" at 1121.79,-2356.56 h72
  text "Top - Bottom" at 1655.61,-2356.56 h60
  text "Via/Pad" at 2311.44,-2356.56 h72
  text "Via" at 2845.26,-2356.56 h60
  text "Pad Shape" at 2901.29,-2356.56 h72
  text "Rounded" at 3435.11,-2356.56 h60
  text "Template" at 3647.09,-2356.56 h72
  text "(Mixed)" at 4180.91,-2356.56 h60
  text "Description" at 4296.92,-2356.56 h72
  text "Hole Tolerance (+)" at 5150.68,-2356.56 h72
  text "Hole Tolerance (-)" at 6484.29,-2356.56 h72
  text "+/-0.080MM" at 7135.83,-2368.11 h78.74
  text "+/-0.080MM" at 5818.9,-2375.98 h78.74
  text "262 Total" at -1273.59,-2506.56 h60
  text "PWB, LID BOARD" at 8813.23,-4345.47 h157.48
  text "PWB-103017-001" at 8948.07,-4650.59 h127.95
  text "1" at 11372.28,-4702.76 h78.74
  text "1" at 11183.31,-4706.69 h78.74
  text "VIAS UNDER U3(BGA) TO BE FILLED." at 9730.55,-6906.5 h118.11
Mechanical 17:
  drawing of 480 lines, arcs and shapes, not listed
  text "FABRICATION NOTES" at 4158,3767 h150
  text "UNLESS OTHERWISE SPECIFIED IN THE ECOBEE PURCHASE ORDER, THE FOLLOWING SPECIFICATIONS  / SHALL APPLY.  / ANY DEVIATION SHALL REQUIRE WRITTEN APPROVAL FROM AN ECOBEE REPRESENTATIVE. /  / 1. BOARD DATA VIEWED FROM PRIMARY SIDE. / 2. LATEST REVISIONS SHALL APPLY TO ALL SPECIFICATIONS. / 3. FABRICATE PCB IN ACCORDANCE WITH IPC-6013C TYPE 2 USING SUPPLIED GERBER OR  / ODB++ CAD DATA. /  /           Performance Class   - Class 2 /           Installation Usage  - Use B /  / 4. FINISH:  IMMERSION GOLD /  / ALL EXPOSED CONDUCTIVE PATTERN AREAS NOT COVERED WITH COVERLAY MATERIAL OR OTHER PLATING  / SHALL BE IMMERSION GOLD (0.000030-0.000090 mm) OVER ELECTROLESS NICKEL (0.001-0.006 mm). /  / 5. LEGEND SHALL BE WHITE, PERMANENT, ORGANIC, NON-CONDUCTIVE UV OR EPOXY TYPE INK APPLIED  / TO THE TOP SIDE OF THE BOARD. THERE SHALL BE NO LEGEND ON ANY SOLDERABLE COMPONENT LAND. /  / 6. ALL ASSEMBLY MATERIALS TO BE RoHS COMPLIANT. /  / 7. THIS IS A NON-WASHABLE ASSEMBLY! /  / 8. ANY LABELS OR COMPOSITION OF, APPLIED TO THE BOARD NEED TO BE APPROVIED BY AIRZAI /  / 14. MINIMUM TRACE WIDTHS: /           EXTERNAL: 0.178 mm  INTERNAL: N/A /  / 15. MINIMUM SPACE BETWEEN FEATURES: /          EXTERNAL: 0.148 mm  INTERNAL: N/A /  / 16. Overall Board Thickness: 31 mils" at 4146,-937 h86.61
  text "Layer" at 437.58,-1152 h60
  text "Name" at 847.49,-1152 h60
  text "Material" at 1777.23,-1152 h60
  text "Thickness" at 2637,-1152 h60
  text "Constant" at 3286.84,-1152 h60
  text "Board Layer Stack" at 3856.7,-1152 h60
  text "1" at 437.58,-1272 h60
  text "Top Overlay" at 847.49,-1272 h60
  text "2" at 437.58,-1392 h60
  text "Top Solder" at 847.49,-1392 h60
  text "Solder Resist" at 1777.23,-1392 h60
  text "0.40mil" at 2637,-1392 h60
  text "3.5" at 3286.84,-1392 h60
  text "3" at 437.58,-1512 h60
  text "Top" at 847.49,-1512 h60
  text "Copper" at 1777.23,-1512 h60
  text "2.36mil" at 2637,-1512 h60
  text "4" at 437.58,-1632 h60
  text "Dielectric1" at 847.49,-1632 h60
  text "FR-4" at 1777.23,-1632 h60
  text "5.20mil" at 2637,-1632 h60
  text "4.8" at 3286.84,-1632 h60
  text "5" at 437.58,-1752 h60
  text "GND" at 847.49,-1752 h60
  text "Copper" at 1777.23,-1752 h60
  text "2.36mil" at 2637,-1752 h60
  text "6" at 437.58,-1872 h60
  text "Dielectric 2" at 847.49,-1872 h60
  text "10.87mil" at 2637,-1872 h60
  text "4.2" at 3286.84,-1872 h60
  text "7" at 437.58,-1992 h60
  text "PWR" at 847.49,-1992 h60
  text "Copper" at 1777.23,-1992 h60
  text "2.36mil" at 2637,-1992 h60
  text "8" at 437.58,-2112 h60
  text "Dielectric3" at 847.49,-2112 h60
  text "FR-4" at 1777.23,-2112 h60
  text "5.20mil" at 2637,-2112 h60
  text "4.8" at 3286.84,-2112 h60
  text "9" at 437.58,-2232 h60
  text "Bottom" at 847.49,-2232 h60
  text "Copper" at 1777.23,-2232 h60
  text "2.36mil" at 2637,-2232 h60
  text "10" at 437.58,-2352 h60
  text "Bottom Solder" at 847.49,-2352 h60
  text "Solder Resist" at 1777.23,-2352 h60
  text "0.40mil" at 2637,-2352 h60
  text "3.5" at 3286.84,-2352 h60
  text "11" at 437.58,-2472 h60
  text "Bottom Overlay" at 847.49,-2472 h60
  text "PWA, LID BOARD" at 8755.16,-4348.43 h157.48
  text "PWA-103017-001" at 8915.59,-4639.76 h127.95
  text "2" at 11175.43,-4694.88 h59.06
  text "2" at 11364.41,-4694.88 h59.06
Mechanical 18:
  lines w5: -2932.25,-2560.83 -2732.25,-2560.83 ; -2932.25,-185.83 -2732.25,-185.83 ; -2932.25,2189.17 -2732.25,2189.17 ; -432.25,-4935.83 -432.25,-4735.83 ; -432.25,4364.17 -432.25,4564.17 ; 2067.75,-4935.83 2067.75,-4735.83 ; 2067.75,4364.17 2067.75,4564.17 ; 4567.75,-4935.83 4567.75,-4735.83 ; 4567.75,4364.17 4567.75,4564.17 ; 7067.75,-4935.83 7067.75,-4735.83 ; 7067.75,4364.17 7067.75,4564.17 ; 7366.96,-4438.04 11866.96,-4438.04 ; 7366.96,-4196.31 8437.63,-4196.31 ; 7366.96,-3962.25 8437.63,-3962.25 ; 7366.96,-3751.43 8437.63,-3751.43 ; 7367.75,-4735.83 11867.75,-4735.83 ; 7992.75,-4739.02 7992.75,-3539.02 ; 8437.63,-4738.04 8437.63,-3538.04 ; 8437.63,-4071.11 11866.81,-4071.11 ; 8777.59,-3538.04 11866.96,-3538.04 ; 8866.96,-3538.04 7366.96,-3538.04 ; 9567.75,-4935.83 9567.75,-4735.83 ; 9567.75,4364.17 9567.75,4564.17 ; 11490.58,-4738.04 11490.58,-4438.04 ; 11867.75,-3535.83 11867.75,-4735.83 ; 11867.75,-2560.83 12067.75,-2560.83 ; 11867.75,-185.83 12067.75,-185.83 ; 11867.75,2189.17 12067.75,2189.17 ; 5966.96,-4738.04 5966.96,-3538.04 7366.96,-3538.04 ; 5966.96,-4738.04 7366.96,-4738.04 ; 5966.96,-4738.04 7366.96,-4738.04 ; 7366.96,-4738.04 7366.96,-3538.04 ; 7366.96,-4738.04 11866.96,-4738.04 ; 7366.96,-4738.04 11866.96,-4738.04 ; 11866.96,-4738.04 11866.96,-3538.04 ; 11866.96,-4738.04 11866.96,-3538.04 ; 11867.75,-4735.83 -2732.25,-4735.83 -2732.25,4364.17 11867.75,4364.17 11867.75,-4735.83 ; -2932.25,-4935.83 12067.75,-4935.83 12067.75,4564.17 -2932.25,4564.17 -2932.25,-4935.83
  text "1" at -1700.91,4434.17 h70
  text "2" at 794.75,4434.17 h70
  text "3" at 3284.1,4434.17 h70
  text "4" at 5790.76,4434.17 h70
  text "5" at 8289.75,4434.17 h70
  text "6" at 10794.75,4434.17 h70
  text "A" at -2857.25,3291.17 h70
  text "A" at 11942.75,3291.17 h70
  text "B" at -2857.25,911.17 h70
  text "B" at 11942.75,911.17 h70
  text "C" at -2857.25,-1463.83 h70
  text "C" at 11942.75,-1463.83 h70
  text "AIRZAI PROPRIETARY & CONFIDENTIAL" at 7522.87,-3427.17 h127.95
  text "DATE:" at 8023.26,-3600.24 h45
  text "ENGINEER:" at 7389.4,-3606.54 h45
  text "UNLESS OTHERWISE SPECIFIED" at 6066.56,-3667.17 h59.06
  text "10/30/17" at 8030.59,-3708.86 h59.06
  text "FD" at 7582.27,-3715.13 h78.74
  text "DIMENSIONS ARE IN MM" at 6188.61,-3793.16 h59.06
  text "PCB DESIGNER:" at 7385.46,-3814.93 h45
  text "DATE:" at 8011.45,-3816.78 h45
  text "D" at -2857.25,-3833.83 h70
  text "D" at 11942.75,-3833.83 h70
  text "AIRZAI" at 8728.58,-3872.05 h127.95
  text "10/30/17" at 8027.64,-3912.6 h59.06
  text "TOLERANCES" at 6389.4,-3919.14 h59.06
  text "DFM" at 7555.9,-3925.01 h78.74
  text "DATE:" at 8011.45,-4029.38 h45
  text "CHECK" at 7385.46,-4031.46 h45
  text "ANGULAR" at 6873.65,-4076.62 h59.06
  text "DECIMALS" at 6070.5,-4088.43 h59.06
  text "TITLE:" at 8489.41,-4134.84 h45
  text "12/08/17" at 8024.68,-4140.94 h59.06
  text "FD" at 7621.64,-4148.2 h78.74
  text ".XX +/- .127MM" at 6023.26,-4245.91 h59.06
  text "+/-" at 6861.84,-4249.85 h59.06
  text "REL" at 7397.27,-4262.45 h45
  text "DATE:" at 8027.19,-4269.54 h45
  text "FD" at 7611.8,-4364.73 h78.74
  text "12/08/17" at 8015.82,-4370.28 h59.06
  text ".XXX +/- .080MM" at 6011.45,-4407.33 h59.06
  text "REV:" at 11513.02,-4501.82 h45
  text "SCALE:" at 8032.71,-4502.61 h45
  text "DWG NO:" at 8483.89,-4510.48 h45
  text "SIZE" at 7397.27,-4513.63 h45
  text "B" at 7601.01,-4644.22 h120
  text "DO NOT SCALE DRAWING" at 6066.56,-4647.49 h70.87
  text "A" at 11596.69,-4663.39 h120
  text "1:1" at 8081.33,-4667.84 h120
  text "SHEET" at 10948.45,-4699.46 h45
  text "OF" at 11212.23,-4699.46 h45
  text "1" at -1700.91,-4865.83 h70
  text "2" at 794.75,-4865.83 h70
  text "3" at 3284.1,-4865.83 h70
  text "4" at 5790.76,-4865.83 h70
  text "5" at 8289.75,-4865.83 h70
  text "6" at 10794.75,-4865.83 h70
Mechanical 20:
  lines w10: -145.67,0 -24.61,0 ; 0,-134.84 0,-26.57
  text "TYP.(3 PLCS)" at 2357.28,2993.11 h60
  text "CENTER 40.089X64.079" at 2023.62,2629.92 h60
  text "CENTER 26.239X15.148" at -786.42,1122.05 h60
  text "CENTER 53.939X15.148" at 2786.93,1077 h60

## Dimensions
-68.9,-118.04 to 1578.29,2851.94 on Mechanical 16
-118.11,-54.13 to 3274.74,0.07 on Mechanical 16
1578.29,2733.83 to 1898.62,3002.95 on Mechanical 16
1033.02,596.36 to 114.17,1053.15 on Mechanical 16
2123.57,596.36 to 2941.93,1002.95 on Mechanical 16
1578.29,2522.81 to 1949.8,2709.65 on Mechanical 16
0,0 to -0.04,-118.04 on Mechanical 16
0,-134.84 to -118.15,0.07 on Mechanical 16